# EAGLE board VDA (EAGLE 9.6.2)
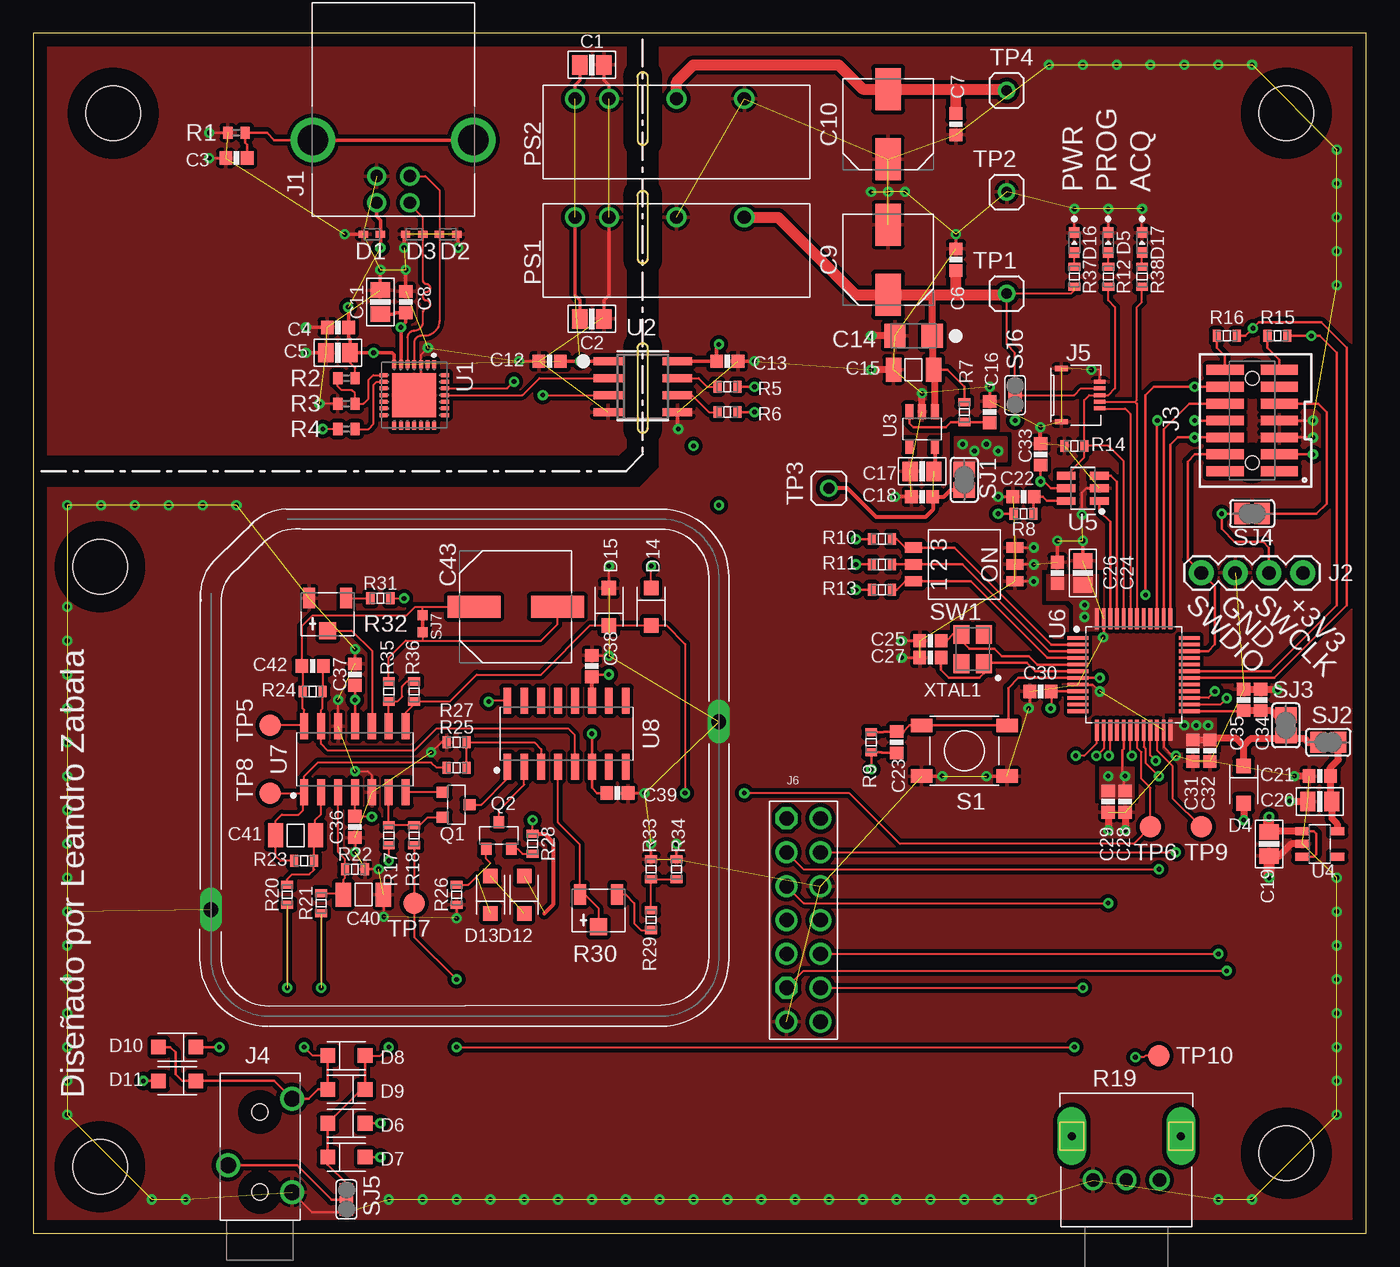
[diagram p0: board, top side]
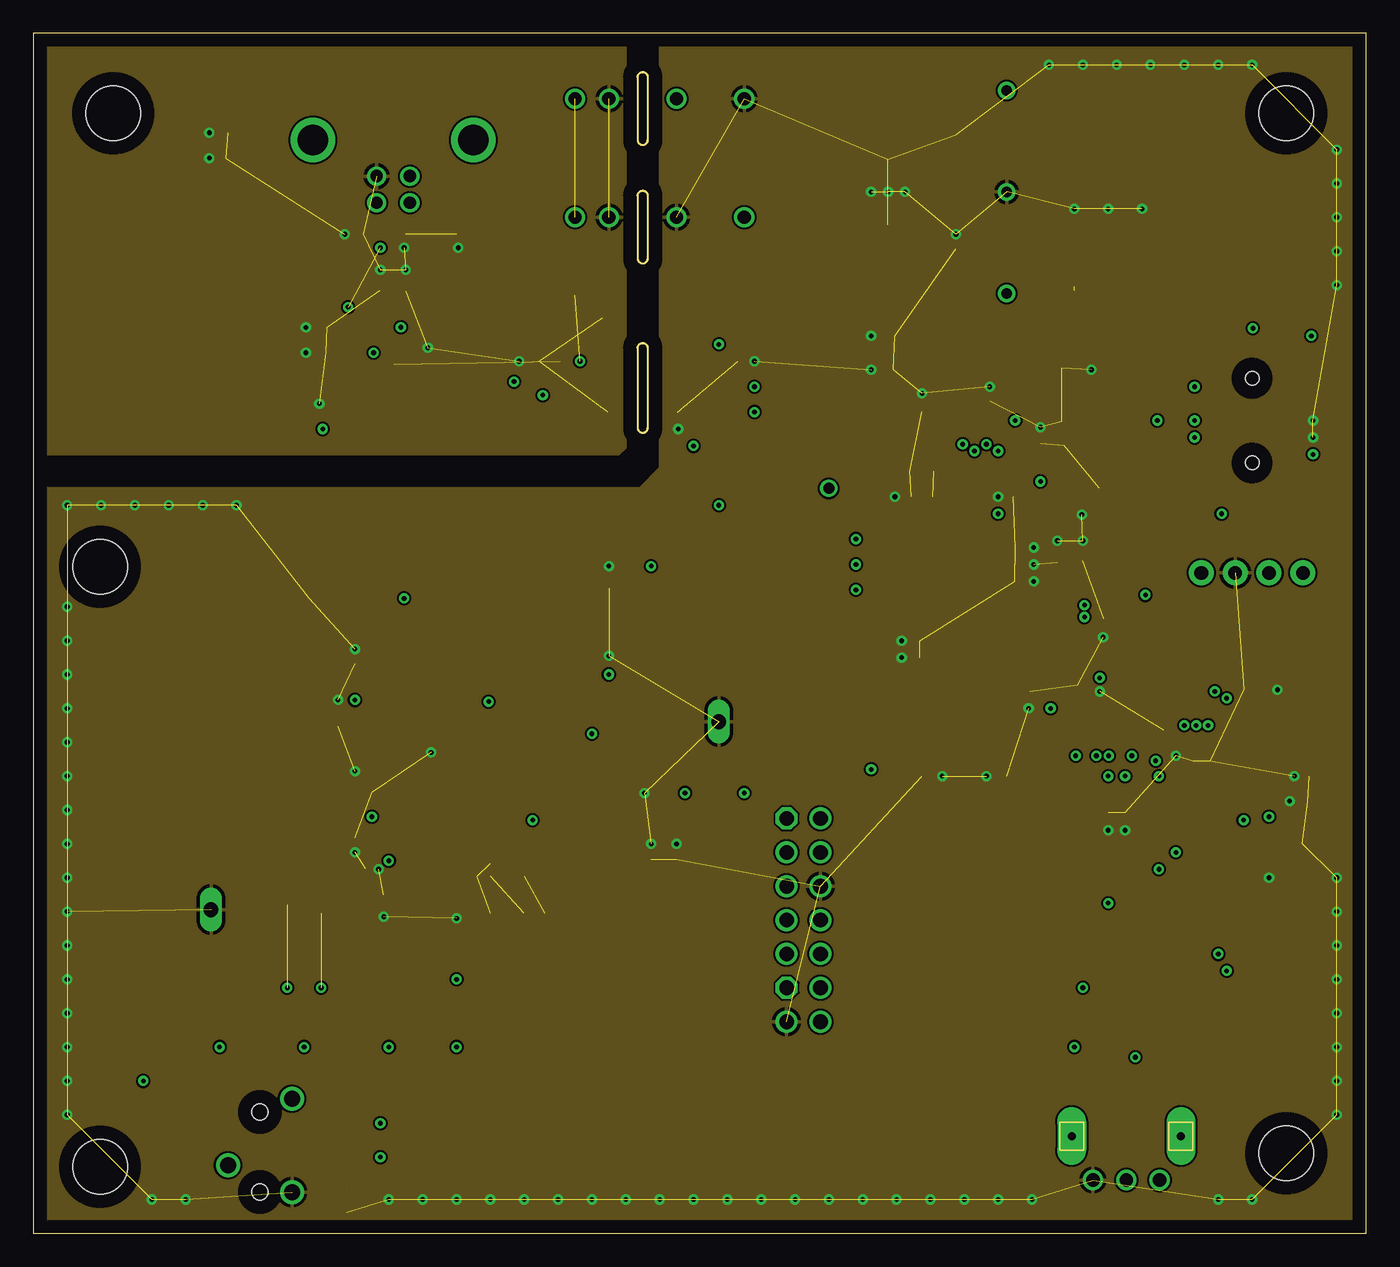
[diagram p1: board, inner layer Route2]
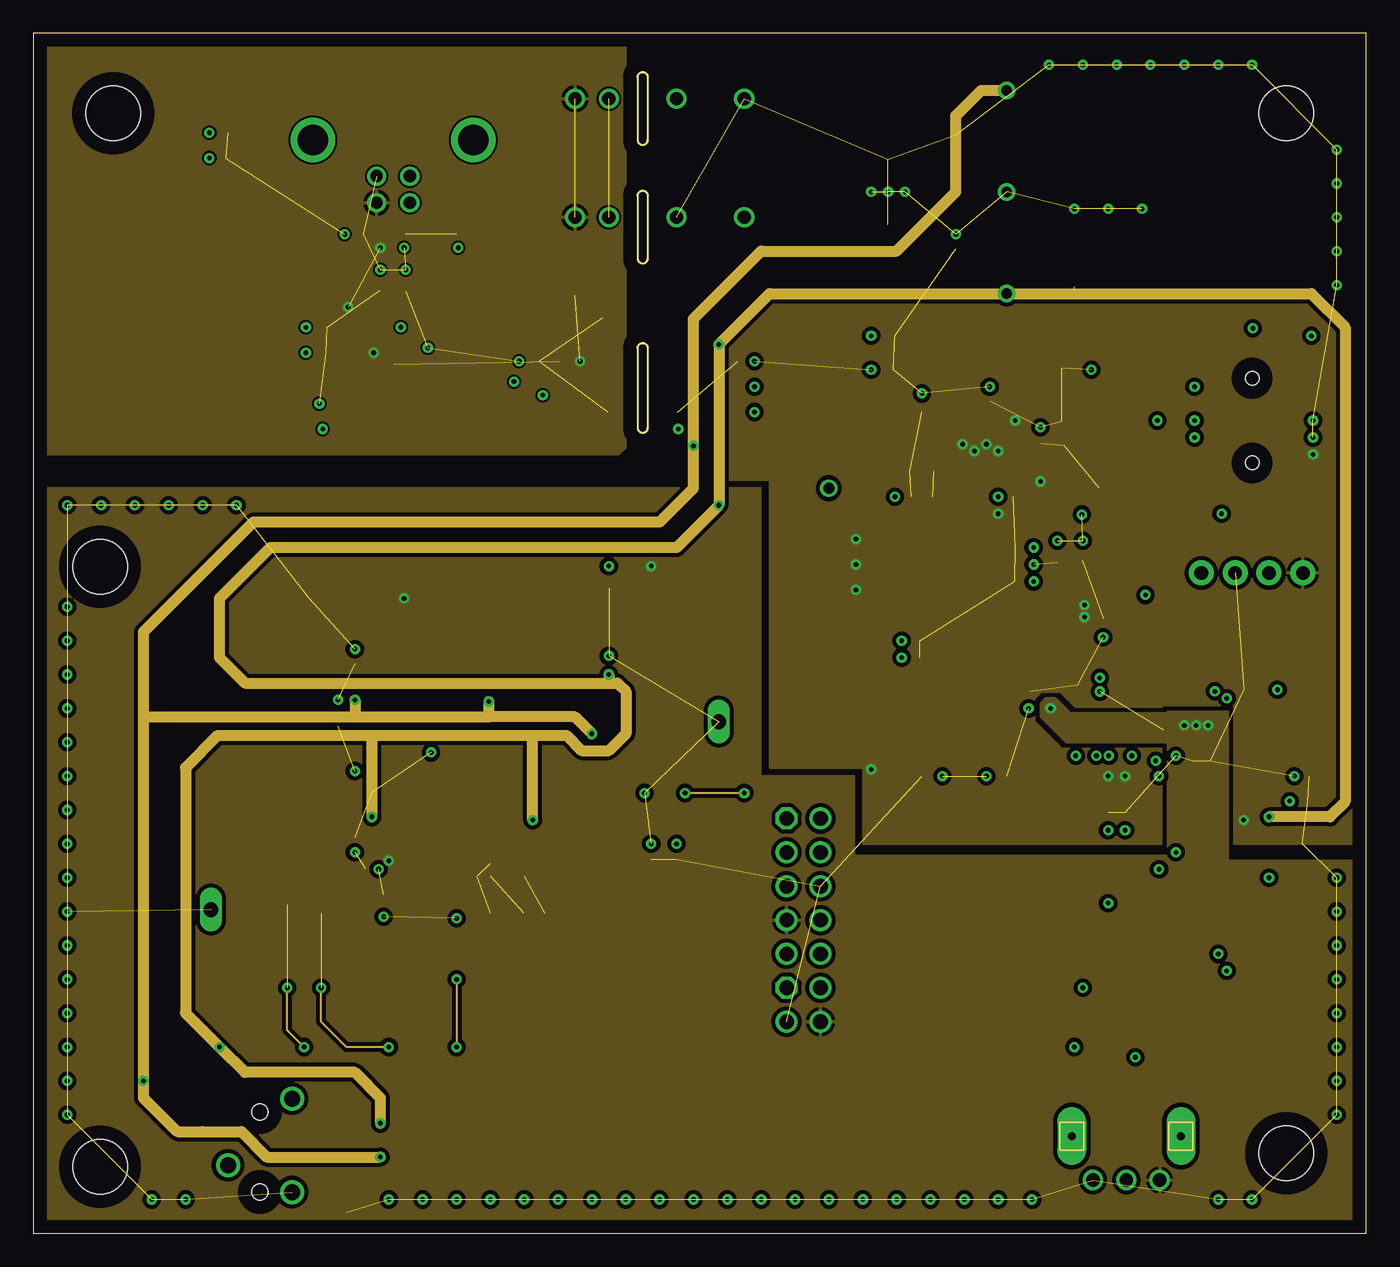
[diagram p2: board, inner layer Route15]
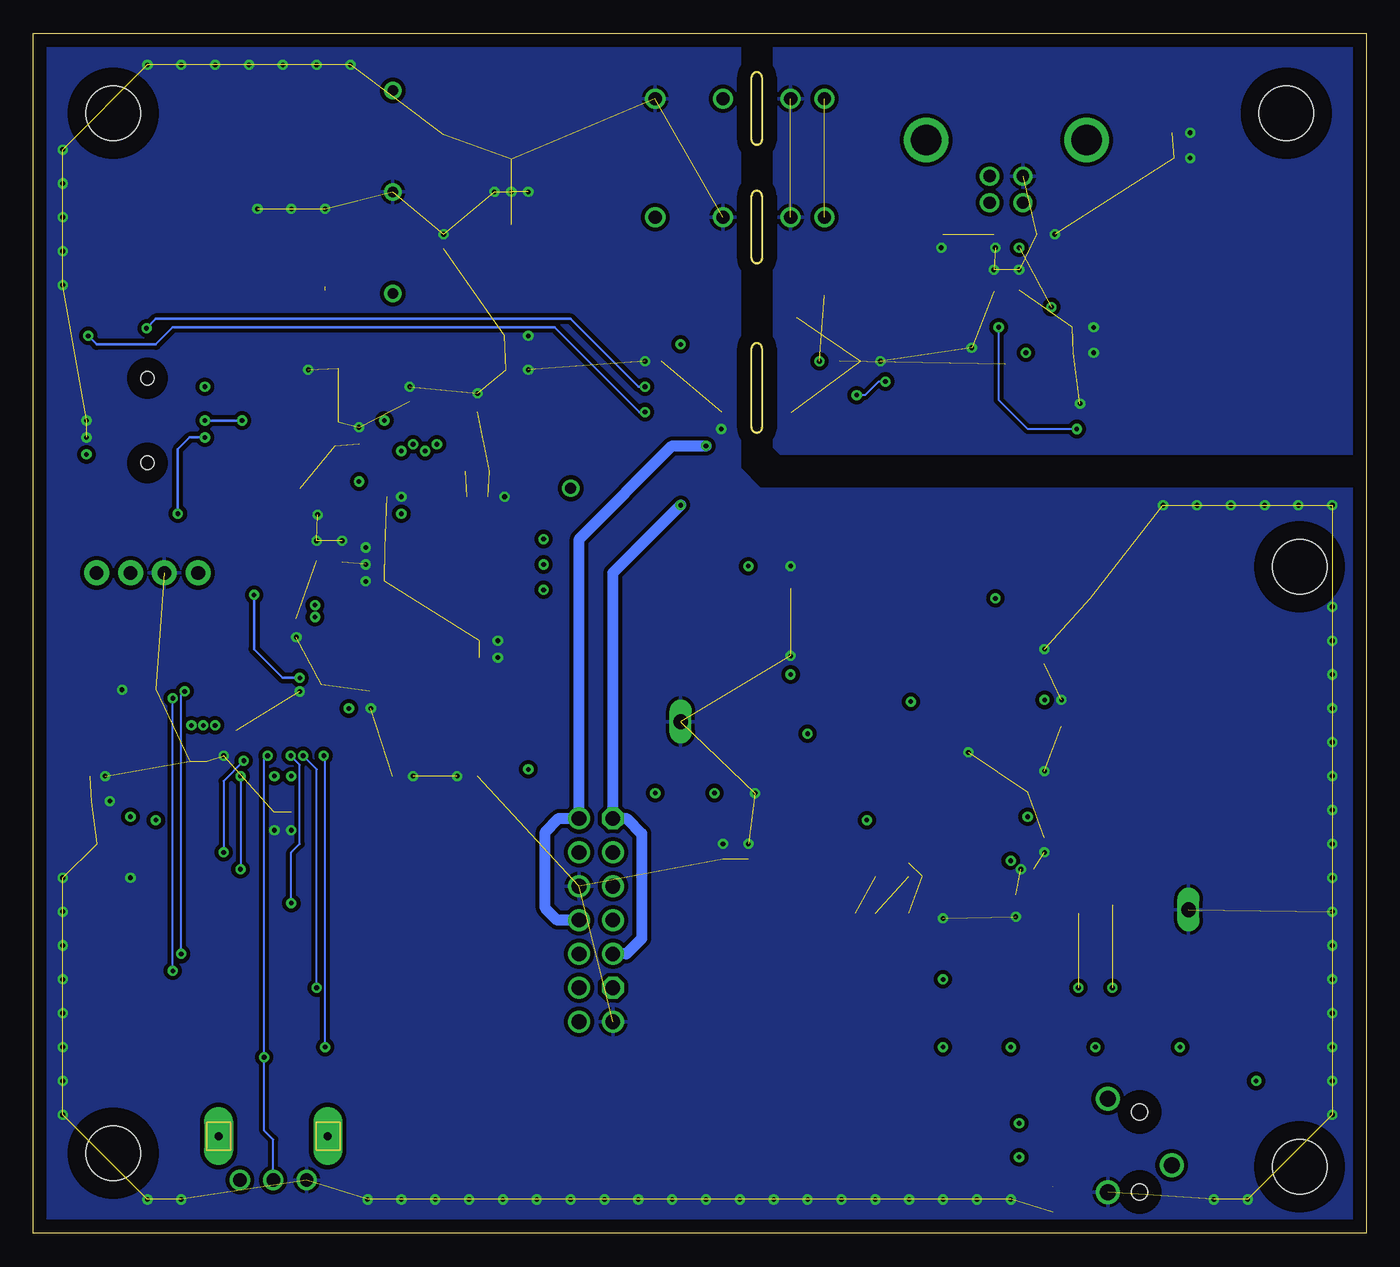
[diagram p3: board, bottom side, seen from below]

Size 100 x 90 mm. Coordinates in mm from the lower left corner, seen from the top.
Outline: 0,0 100,0 100,90 0,90 0,0
Outline: 45.34,66.39 45.34,60.42 arc90 45.72,60.04 arc90 46.1,60.42 46.1,66.39 arc90 45.72,66.77 arc90 45.34,66.39
Outline: 45.34,77.82 45.34,73.12 arc90 45.72,72.74 arc90 46.1,73.12 46.1,77.82 arc90 45.72,78.2 arc90 45.34,77.82
Outline: 45.34,86.71 45.34,82.01 arc90 45.72,81.63 arc90 46.1,82.01 46.1,86.71 arc90 45.72,87.09 arc90 45.34,86.71
Copper layers (1+2*15+16): Top 0.035mm / dielectric 0.14mm / Route2 0.035mm / dielectric 1.2mm / Route15 0.035mm / dielectric 0.2mm / Bottom 0.035mm
Design rules "default *": minimum track width 6mil, minimum drill 0.35mm, track to track 6mil, track to pad 6mil, pad to pad 6mil, via to via 6mil, smd to smd 6mil, copper to edge 40mil, drill to drill 6mil, minimum pad ring 10mil, minimum via ring 8mil, stop-mask expansion 4mil, vias tented up to drill 9999mil, thermal gap 10mil
Holes 4.1 mm at 6,84 94,84 94,6 5,5 5,50
tRestrict: area 3,81 to 9,87; area 91,81 to 97,87; area 91,3 to 97,9; area 2,2 to 8,8; area 2,47 to 8,53
bRestrict: area 3,81 to 9,87; area 91,81 to 97,87; area 91,3 to 97,9; area 2,2 to 8,8; area 2,47 to 8,53
vRestrict: area 3,81 to 9,87; area 91,81 to 97,87; area 91,3 to 97,9; area 2,2 to 8,8; area 2,47 to 8,53

## Footprints (pad centres in the part's own frame; a part is rotated, then mirrored left to right if it is on the bottom)
C_0805 = smd 1.15 x 1.45: P$1 -0.9,0; P$2 0.9,0
C_0603 = smd 0.95 x 1: P$1 -0.8,0; P$2 0.8,0
CAPAE660X590N = smd 3.165 x 1.92: + -2.625,0; - 2.625,0
A_3216 = smd 1.6 x 1.8: A -1.4,0; K 1.4,0
C_1206 = smd 1.15 x 1.8: P$1 -1.5,0; P$2 1.5,0
CAPAE830X680N = smd 3.965 x 1.62: 1 -3.125,0; 2 3.125,0
SOD523 = smd 0.7 x 0.5: A 0.65,0; C -0.65,0
SOD123W = smd 1.1 x 1.1: A 1.4,0; C -1.4,0
LED_0603_ARROW = smd 0.787 x 0.787: A 0.749,0; K -0.749,0
USB-B = drill 0.92: 1 1.25,4.71; 2 -1.25,4.71; 3 -1.25,2.71; 4 1.25,2.71 | drill 2.3: M1 -6.02,0; M2 6.02,0
1X04 = drill 1.016 pad 1.88: 1 0,0; 2 2.54,0; 3 5.08,0; 4 7.62,0
SAMTEC_FTSH-107-01-L-DV-K-A = smd 0.74 x 2.79: 01 -3.81,-2.035; 02 -3.81,2.035; 03 -2.54,-2.035; 04 -2.54,2.035; 05 -1.27,-2.035; 06 -1.27,2.035; 07 0,-2.035; 08 0,2.035; 09 1.27,-2.035; 10 1.27,2.035; 11 2.54,-2.035; 12 2.54,2.035; 13 3.81,-2.035; 14 3.81,2.035 | hole 1.02: 3.175,0; -3.175,0
PJ-3200 = drill 1.2: 1 2.1,-2.4; 2 9.1,-2.4; 3 4.1,2.4 | hole 1.2: 2.1,0; 8.1,0
F0504-H-05-10G-R = smd 0.3 x 0.85: P$1 -1,1.905; P$2 -0.5,1.905; P$3 0,1.905; P$4 0.5,1.905; P$5 1,1.905 | smd 0.4 x 0.95: P$7 -2,-0.97; P$8 2,-0.97
CONN-VERT-2.54MM-2X7-FEMALE = drill 1.1 octagon: 1 -7.62,-1.27; 11 5.08,-1.27 | drill 1.1: 2 -7.62,1.27; 3 -5.08,-1.27; 4 -5.08,1.27; 5 -2.54,-1.27; 6 -2.54,1.27; 7 0,-1.27; 8 0,1.27; 9 2.54,-1.27; 10 2.54,1.27; 12 5.08,1.27; 13 7.62,-1.27; 14 7.62,1.27
0505S-2WR3 = drill 1: +VIN -7.62,0; +VOUT 5.08,0; -VIN -5.08,0; -VOUT 0,0
SOT-23 = smd 0.8 x 0.9: 1 -0.94,-1.003; 2 0.94,-1.003; 3 0,1.003
R0402 = smd 0.7 x 0.9: 1 -0.65,0; 2 0.65,0
R_0603 = smd 0.61 x 0.889: 1 -0.749,0; 2 0.749,0
POT-09VR1M = drill 1: P$1 0,-2.5; P$2 0,0; P$3 0,2.5 | drill 0.6 pad 2.184 long: P$4 -3.3,4.1; P$5 -3.3,-4.1
RV3.2X4 = smd 1.55 x 0.89: 1 1.93,-2.525; 3 1.93,0.265 | smd 1.27 x 1.27: 2 -0.51,-1.13
SMTR2 = smd 1.6 x 1: P$1 -3.2,1.9; P$2 3.2,1.9; P$3 -3.2,-1.9; P$4 3.2,-1.9
MS384 = drill 1.1 long: P$1 -19.05,-10.65; P$2 19.05,3.45
SJ = smd 1.168 x 1.6: 1 -0.762,0; 2 0.762,0
SJ_2S = smd 0.508 x 1.016: COM 0,0; NC -0.953,0; NO 0.953,0
SJ1 = smd 0.762 x 0.762: P$1 -0.635,0; P$2 0.635,0
DIPSW-3 = smd 0.76 x 1.27: P$1 -1.27,-3.81; P$2 -1.27,3.81; P$3 0,-3.81; P$4 0,3.81; P$5 1.27,-3.81; P$6 1.27,3.81
HOLE_0.8MM = drill 0.8: 1 0,0
TP16R = smd 1.6 x 1.6: TP 0,0
MLP28 = smd 0.6 x 0.3: 1 -2.3,1.5; 2 -2.3,1; 3 -2.3,0.5; 4 -2.3,0; 5 -2.3,-0.5; 6 -2.3,-1; 7 -2.3,-1.5; 15 2.3,-1.5; 16 2.3,-1; 17 2.3,-0.5; 18 2.3,0; 19 2.3,0.5; 20 2.3,1; 21 2.3,1.5 | smd 0.3 x 0.6: 8 -1.5,-2.3; 9 -1,-2.3; 10 -0.5,-2.3; 11 0,-2.3; 12 0.5,-2.3; 13 1,-2.3; 14 1.5,-2.3; 22 1.5,2.3; 23 1,2.3; 24 0.5,2.3; 25 0,2.3; 26 -0.5,2.3; 27 -1,2.3; 28 -1.5,2.3 | smd 3.3 x 3.3: EXP 0,0
SO8 = smd 0.6 x 2.2: 1 -1.905,-2.6; 2 -0.635,-2.6; 3 0.635,-2.6; 4 1.905,-2.6; 5 1.905,2.6; 6 0.635,2.6; 7 -0.635,2.6; 8 -1.905,2.6
SOT23-5 = smd 0.6 x 1.1: 1 -0.95,-1.3; 2 0,-1.3; 3 0.95,-1.3; 4 0.95,1.3; 5 -0.95,1.3
SOT-23-6 = smd 1.412 x 0.59: 1 -1.247,0.95; 2 -1.247,0; 3 -1.247,-0.95; 4 1.247,-0.95; 5 1.247,0; 6 1.247,0.95
QFP50P900X900X160-48N = smd 1.559 x 0.28: 1 -4.178,2.75; 2 -4.178,2.25; 3 -4.178,1.75; 4 -4.178,1.25; 5 -4.178,0.75; 6 -4.178,0.25; 7 -4.178,-0.25; 8 -4.178,-0.75; 9 -4.178,-1.25; 10 -4.178,-1.75; 11 -4.178,-2.25; 12 -4.178,-2.75; 25 4.178,-2.75; 26 4.178,-2.25; 27 4.178,-1.75; 28 4.178,-1.25; 29 4.178,-0.75; 30 4.178,-0.25; 31 4.178,0.25; 32 4.178,0.75; 33 4.178,1.25; 34 4.178,1.75; 35 4.178,2.25; 36 4.178,2.75 | smd 0.28 x 1.559: 13 -2.75,-4.178; 14 -2.25,-4.178; 15 -1.75,-4.178; 16 -1.25,-4.178; 17 -0.75,-4.178; 18 -0.25,-4.178; 19 0.25,-4.178; 20 0.75,-4.178; 21 1.25,-4.178; 22 1.75,-4.178; 23 2.25,-4.178; 24 2.75,-4.178; 37 2.75,4.178; 38 2.25,4.178; 39 1.75,4.178; 40 1.25,4.178; 41 0.75,4.178; 42 0.25,4.178; 43 -0.25,4.178; 44 -0.75,4.178; 45 -1.25,4.178; 46 -1.75,4.178; 47 -2.25,4.178; 48 -2.75,4.178
SOIC127P600X175-14N = smd 1.968 x 0.602: 1 -2.473,3.81; 2 -2.473,2.54; 3 -2.473,1.27; 4 -2.473,0; 5 -2.473,-1.27; 6 -2.473,-2.54; 7 -2.473,-3.81; 8 2.473,-3.81; 9 2.473,-2.54; 10 2.473,-1.27; 11 2.473,0; 12 2.473,1.27; 13 2.473,2.54; 14 2.473,3.81
SO16 = smd 1.972 x 0.582: 1 -2.472,4.445; 2 -2.472,3.175; 3 -2.472,1.905; 4 -2.472,0.635; 5 -2.472,-0.635; 6 -2.472,-1.905; 7 -2.472,-3.175; 8 -2.472,-4.445; 9 2.472,-4.445; 10 2.472,-3.175; 11 2.472,-1.905; 12 2.472,-0.635; 13 2.472,0.635; 14 2.472,1.905; 15 2.472,3.175; 16 2.472,4.445
XTAL3.2X2.5 = smd 1.4 x 1.2: P$1 -1.1,-0.85; P$2 1.1,-0.85; P$3 1.1,0.85; P$4 -1.1,0.85

## Placement (x,y rotation side)
C1  4.7u  [C_0805]  41.91,87.63 0 top
C2  4.7u  [C_0805]  41.91,68.58 0 top
C3  100n  [C_0603]  15.24,80.64 180 top
C4  100n  [C_0603]  22.86,67.94 180 top
C5  4.7u  [C_0805]  22.86,66.04 180 top
C6  100n  [C_0603]  69.22,73.03 90 top
C7  100n  [C_0603]  69.22,83.19 90 top
C8  100n  [C_0603]  27.94,69.85 90 top
C9  22u  [CAPAE660X590N]  64.14,73.03 90 top
C10  22u  [CAPAE660X590N]  64.14,83.19 90 top
C11  4.7u  [C_0805]  26.04,69.85 90 top
C12  100n  [C_0603]  38.73,65.41 180 top
C13  100n  [C_0603]  52.07,65.41 0 top
C14  47u  [A_3216]  66.04,67.31 180 top
C15  47u  [C_1206]  66.04,64.77 180 top
C16  220n  [C_0603]  71.75,61.59 90 top
C17  4.7u  [C_0805]  66.67,57.15 180 top
C18  100n  [C_0603]  66.67,55.24 180 top
C19  4.7u  [C_0805]  92.71,29.21 270 top
C20  4.7u  [C_0805]  96.52,32.38 180 top
C21  100n  [C_0603]  96.52,34.29 180 top
C22  220n  [C_0603]  74.3,55.24 180 top
C23  100n  [C_0603]  64.77,36.83 90 top
C24  4u7  [C_0805]  78.74,49.53 90 top
C25  10p  [C_0603]  67.31,44.45 180 top
C26  100n  [C_0603]  76.83,49.53 90 top
C27  10p  [C_0603]  67.31,43.18 180 top
C28  100n  [C_0603]  81.92,32.38 270 top
C29  100n  [C_0603]  80.64,32.38 270 top
C30  100n  [C_0603]  75.56,40.64 180 top
C31  100n  [C_0603]  87,36.2 270 top
C32  100n  [C_0603]  88.27,36.2 270 top
C33  100n  [C_0603]  75.56,58.42 90 top
C34  1u  [C_0603]  92.08,40.01 90 top
C35  100n  [C_0603]  90.81,40.01 90 top
C36  100n  [C_0603]  24.13,30.48 270 top
C37  100n  [C_0603]  24.13,41.91 270 top
C38  100n  [C_0603]  41.91,42.55 90 top
C39  100n  [C_0603]  43.81,33.02 180 top
C40  100n  [C_1206]  24.77,25.4 0 top
C41  100n  [C_1206]  19.68,29.84 180 top
C42  47n  [C_0603]  20.95,42.55 0 top
C43  DNP  [CAPAE830X680N]  36.2,46.99 0 top
D1  LESD5D5.0CT1G  [SOD523]  25.4,74.93 0 top
D2  LESD5D5.0CT1G  [SOD523]  31.11,74.93 180 top
D3  LESD5D5.0CT1G  [SOD523]  28.57,74.93 0 top
D4  D-SOD123W  [SOD123W]  90.81,33.66 270 top
D5  ORANGE  [LED_0603_ARROW]  80.64,74.3 270 top
D6  1N4148  [SOD123W]  23.5,8.26 180 top
D7  1N4148  [SOD123W]  23.5,5.71 0 top
D8  1N4148  [SOD123W]  23.5,13.34 0 top
D9  1N4148  [SOD123W]  23.5,10.79 180 top
D10  1N4148  [SOD123W]  10.79,13.97 180 top
D11  1N4148  [SOD123W]  10.79,11.43 180 top
D12  1N4148  [SOD123W]  36.83,25.4 90 top
D13  1N4148  [SOD123W]  34.29,25.4 90 top
D14  1N4148  [SOD123W]  46.35,46.99 270 top
D15  1N4148  [SOD123W]  43.18,46.99 90 top
D16  GREEN  [LED_0603_ARROW]  78.11,74.3 270 top
D17  ORANGE  [LED_0603_ARROW]  83.19,74.3 270 top
J1  USB-2.0  [USB-B]  27,82 180 top
J2  CONVERT-1X4-2.54MM-MALE_HOLES  [1X04]  87.63,49.53 0 top
J3  FTSH-107-01-L-DV-K-A  [SAMTEC_FTSH-107-01-L-DV-K-A]  91.44,60.96 90 top
J4  STEREO-JACK  [PJ-3200]  17,1 90 top
J5  F0504-H-05-10G-R  [F0504-H-05-10G-R]  78.11,62.87 270 top
J6  CONVERT-2X7-2.54MM-FEMALE  [CONN-VERT-2.54MM-2X7-FEMALE]  57.78,23.5 270 top
PS1  F0505S-2WR3L  [0505S-2WR3]  48.26,76.2 0 top
PS2  F0505S-2WR3L  [0505S-2WR3]  48.26,85.09 0 top
Q1  BC856  [SOT-23]  31.73,32.15 270 top
Q2  BC856  [SOT-23]  34.92,29.84 0 top
R1  47.5k  [R0402]  15.24,82.55 180 top
R2  22.1k  [R0402]  23.5,64.14 0 top
R3  47.5k  [R0402]  23.5,62.23 180 top
R4  1k  [R0402]  23.5,60.33 0 top
R5  100  [R_0603]  52.07,63.5 0 top
R6  100  [R_0603]  52.07,61.59 0 top
R7  100k  [R_0603]  69.85,61.59 90 top
R8  10k  [R_0603]  74.3,53.98 180 top
R9  10k  [R_0603]  62.87,36.83 270 top
R10  10k  [R_0603]  63.66,52.07 180 top
R11  10k  [R_0603]  63.66,50.16 180 top
R12  270  [R_0603]  80.64,71.75 90 top
R13  10k  [R_0603]  63.66,48.26 180 top
R14  10k  [R_0603]  78.11,59.05 180 top
R15  100  [R_0603]  93.34,67.31 180 top
R16  100  [R_0603]  89.53,67.31 180 top
R17  DNP  [R_0603]  26.67,29.84 270 top
R18  33k  [R_0603]  28.57,29.84 270 top
R19  10k  [POT-09VR1M]  82,4 270 top
R20  100  [R_0603]  19.05,25.4 270 top
R21  100  [R_0603]  21.59,24.77 270 top
R22  10M  [R_0603]  24.13,27.3 180 top
R23  10M  [R_0603]  20.32,27.94 0 top
R24  100k  [R_0603]  20.95,40.64 180 top
R25  1k  [R_0603]  31.75,34.92 0 top
R26  150  [R_0603]  31.75,25.4 90 top
R27  2k  [R_0603]  31.75,36.83 180 top
R28  1k  [R_0603]  37.47,29.21 90 top
R29  100  [R_0603]  46.35,23.5 90 top
R30  500  [RV3.2X4]  41.27,23.5 90 top
R31  1k  [R_0603]  26.04,47.62 0 top
R32  500  [RV3.2X4]  20.95,45.72 90 top
R33  100  [R_0603]  46.35,27.3 90 top
R34  DNP  [R_0603]  48.26,27.3 90 top
R35  1k  [R_0603]  26.67,40.64 270 top
R36  2k2  [R_0603]  28.57,40.64 270 top
R37  270  [R_0603]  78.11,71.75 90 top
R38  270  [R_0603]  83.19,71.75 90 top
S1  TSWITCH_SMTR2  [SMTR2]  69.85,36.2 0 top
SHIELD1  MS384  [MS384]  32.38,34.92 0 top
SJ1  [SJ]  69.85,56.52 270 top
SJ2  [SJ]  97.16,36.83 0 top
SJ3  [SJ]  93.98,38.1 90 top
SJ4  [SJ]  91.44,53.98 180 top
SJ5  [SJ_2S]  23.5,2.54 270 top
SJ6  [SJ_2S]  73.66,62.87 270 top
SJ7  SJUMPER-NC  [SJ1]  29.21,45.72 270 top
SW1  DSHP03TSGER  [DIPSW-3]  69.85,50.16 270 top
TP1  HOLE_0.8MM  [HOLE_0.8MM]  73.03,70.48 0 top
TP2  HOLE_0.8MM  [HOLE_0.8MM]  73.03,78.11 0 top
TP3  HOLE_0.8MM  [HOLE_0.8MM]  59.69,55.88 90 top
TP4  HOLE_0.8MM  [HOLE_0.8MM]  73.03,85.72 0 top
TP5  TPTP16R  [TP16R]  17.78,38.1 90 top
TP6  TPTP16R  [TP16R]  83.82,30.48 0 top
TP7  TPTP16R  [TP16R]  28.57,24.77 180 top
TP8  TPTP16R  [TP16R]  17.78,33.02 90 top
TP9  TPTP16R  [TP16R]  87.63,30.48 0 top
TP10  TPTP16R  [TP16R]  84.45,13.34 0 top
U1  CP2102N-28  [MLP28]  28.57,62.87 270 top
U2  ISO7721DR  [SO8]  45.72,63.5 270 top
U3  LP5907MFX-3.3/NOPB  [SOT23-5]  66.67,60.33 180 top
U4  LP5907MFX-3.3/NOPB  [SOT23-5]  96.52,29.21 270 top
U5  SN74LVC1G175  [SOT-23-6]  78.74,55.88 180 top
U6  STM32F373CBT6  [QFP50P900X900X160-48N]  82.55,41.91 0 top
U7  TL074  [SOIC127P600X175-14N]  24.13,35.56 90 top
U8  LM13700  [SO16]  40.01,37.47 90 top
XTAL1  8MHz  [XTAL3.2X2.5]  70.48,43.81 90 top

## Library data of the parts
C1-C14 C16 C17 C19 C20 C22-C33 C36-C39 C42 C43 D5-D17 Q1 Q2 R5-R18 R24-R29 R31 R33-R38 = Property-standar
C15 = Property-standar; D: X7R; ESR: LOW; V: 10V
C18 C21 C34 C35 = Property-standar; V: 16V
C40 C41 = Property-standar; DESCRIPTION: NP0-C0G
D1-D3 S1 U1 U6 U7 = property
D4 = Property-standar; TYPE: Schotky
J1 J4 = Connectors
J2 J5 J6 TP1-TP4 = property-connectors
J3 = property-connectors; MANUFACTURER: Samtec; MAXIMUM_PACKAGE_HEIGHT: 6.23mm; PARTREV: H; STANDARD: Manufacturer Recommendation
PS1 PS2 = Power-Supply
R1-R4 = resistor
R19 = Property-standar; MPN: RK09K1110077
R20-R23 = Property-standar; DESCRIPTION: FILM
R30 R32 = Property-standar; MPN: 3224W-1-501E
SHIELD1 = shields
SJ1-SJ4 = jumper
SJ5 SJ6 TP5-TP10 = property-pads
SJ7 SW1 = properti-mechanical
U2 U5 = property_digital
U3 U4 = property-power
U8 = property_analog
XTAL1 = property; MPN: 830108313809

## Nets
+3V3: C23.P$1 C24.P$1 C26.P$1 C28.P$1 C29.P$1 C33.P$1 D4.A J2.4 J3.03 R8.2 R9.2 R10.2 R11.2 R13.2 SJ1.1 SJ6.NO U5.5 U6.17 U6.48
+3V3A: C30.P$1 C31.P$1 C32.P$1 D4.C D14.C J6.7 J6.14 R17.2 R19.P$3 R31.2 SJ2.1 SJ3.1 U6.9 U6.24
+5V: C6.P$1 C9.+ C13.P$1 C14.A C15.P$1 C19.P$1 C36.P$1 C38.P$1 D6.C D10.C D12.A J6.1 J6.9 PS1.+VOUT R7.2 R28.2 R37.1 SJ6.NC TP1.1 U2.8 U3.1 U4.1 U4.3 U7.4 U8.11
-5V: C7.P$2 C10.- C37.P$2 C39.P$2 D7.A D11.A J6.2 J6.8 PS2.-VOUT TP4.1 U7.11 U8.6 U8.16
ACQ_LED: J5.P$4 R38.1 U6.42
BOOT0: J5.P$3 R12.1 R14.1 U5.4 U6.44
DAC1_CH1: R18.2 TP7.TP U6.13
DAC1_CH2: J6.12 U6.14
DAC2_CH1: J6.5 U6.15
FF_CLK: U5.1 U6.46
FF_CLR: C22.P$1 R8.1 U5.6
FF_D: U5.3 U6.45
GND: C6.P$2 C7.P$1 C9.- C10.+ C13.P$2 C14.K C15.P$2 C16.P$2 C17.P$2 C18.P$2 C19.P$2 C20.P$2 C21.P$2 C22.P$2 C24.P$2 C25.P$2 C26.P$2 C27.P$2 C28.P$2 C29.P$2 C30.P$2 C31.P$2 C32.P$2 C33.P$2 C34.P$2 C35.P$2 C36.P$2 C37.P$1 C38.P$2 C39.P$1 C40.P$2 D5.K D15.A D16.K D17.K J2.2 J3.05 J3.07 J4.1 J5.P$1 J5.P$7 J5.P$8 J6.6 J6.13 PS1.-VOUT PS2.+VOUT R14.2 R19.P$1 R22.1 R26.1 R27.2 R32.3 R33.2 R34.2 S1.P$3 S1.P$4 SHIELD1.P$1 SHIELD1.P$2 SJ5.NO SW1.P$2 SW1.P$4 SW1.P$6 TP2.1 U2.5 U3.2 U4.2 U5.2 U6.8 U6.23 U6.47 U7.5 U7.12
GND-1: C1.P$2 C2.P$2 C3.P$2 C4.P$2 C5.P$2 C8.P$2 C11.P$2 C12.P$2 D1.C D2.C D3.C J1.4 PS1.-VIN PS2.-VIN R1.2 R3.2 U1.3 U1.EXP U2.4
I_ABC: Q1.3 U8.1
JCLK: J2.3 J3.06 SJ4.2 U6.37
JRCLK: J3.09 SJ4.1
JTDI: J3.10 U6.38
JTDO: J3.08 U6.39
JTMS: J2.1 J3.04 U6.34
MCU_RX: J3.13 R15.2
MCU_TX: J3.14 R16.2
N$1: C17.P$1 C18.P$1 SJ1.2 TP3.1 U3.5
N$2: C42.P$1 C43.1 R24.2 SJ7.P$1 TP5.TP U7.14
N$3: C40.P$1 R21.1 R22.2 U7.3
N$4: C41.P$1 R20.1 R23.2 U7.2
N$5: C43.2 R35.1 SJ7.P$2
N$6: J4.3 SJ5.COM
N$7: Q1.2 R17.1 R18.1 U7.6
N$8: D17.A R38.2
N$9: R29.2 R33.1 R34.1
N$10: Q1.1 U7.7
N$11: Q2.2 R28.1
N$12: D12.C D13.A
N$13: R31.1 R32.1
N$14: D16.A R37.2
N$15: D5.A R12.2
N$16: D8.C D9.A D10.A D11.C J4.2 R20.2
N$17: D6.A D7.C D8.A D9.C R21.2 SJ5.NC
N$18: R32.2 U7.10
N$19: R25.2 R27.1 U8.3
N$20: R30.2 R30.3 U8.4
N$21: Q2.3 U8.2
N$22: R29.1 R30.1
N$23: J5.P$2 SJ6.COM
N$24: D13.C Q2.1 R26.2
N$27: R35.2 R36.1 U7.9
N$46: C16.P$1 R7.1 U3.3
N$50: C20.P$1 C21.P$1 SJ2.2 U4.5
N$54: R4.2 U1.9
NRST: C23.P$2 J3.12 R9.1 S1.P$1 S1.P$2 U6.7
OSC2_IN: C25.P$1 U6.5 XTAL1.P$3
OSC2_OUT: C27.P$1 U6.6 XTAL1.P$1
OUT_CHARGE_AMP: C41.P$2 R23.1 R25.1 TP8.TP U7.1
OUT_OTA: C42.P$2 R24.1 U7.13 U8.5
POWER_LED: J5.P$5 U6.43
RXD: U1.25 U2.2
SDADC1_CH4: J6.3 U6.20
SDADC1_CH5: D14.A D15.C R36.2 TP6.TP U6.19 U7.8
SDADC1_CH6: R19.P$2 TP10.TP U6.18
SDADC1_CH7: TP9.TP U6.22
SDADC1_CH8: J6.4 U6.21
SDADC3_CH7: J6.10 U6.27
SDADC3_CH8: J6.11 U6.26
SHIELD: C3.P$1 J1.M1 J1.M2 R1.1
SW_1: R10.1 SW1.P$1 U6.2
SW_2: R11.1 SW1.P$3 U6.3
SW_3: R13.1 SW1.P$5 U6.4
TXD: U1.26 U2.3
USART_RX: R6.2 R15.1 U6.31
USART_TX: R5.2 R16.1 U6.30
USB_DET: R2.1 R3.1 U1.8
USB_DN: D3.A J1.2 U1.5
USB_DP: D2.A J1.3 U1.4
USB_RXD: R5.1 U2.7
USB_TXD: R6.1 U2.6
VBAT: U6.1
VDD_BRIDGE: C8.P$1 C11.P$1 R4.1 U1.6
VREF_SDADC: C34.P$1 C35.P$1 SJ3.2 U6.25
VUSB: C1.P$1 C2.P$1 C4.P$1 C5.P$1 C12.P$1 D1.A J1.1 PS1.+VIN PS2.+VIN R2.2 U1.7 U2.1

## Tracks (layer width: path | path; a pad name or v marks a point on that pad's centre or on a via)
+3V3  (via drill 0.35)
  Top 0.152: 81.8,33.3 C28.P$1
  Top 0.203: C23.P$1 63.68,36.03 63.63,36.08 R9.2 v62.87,34.8 | R13.2 v61.72,48.26 | R11.2 v61.72,50.16 | 81.8,33.3 81.8,34.29 81.7,34.39 81.7,36.23 81.8,36.33 U6.17 | J3.03 v96.01,58.42 | R8.2 v72.39,53.98 | U5.5 76.33,55.88 75.82,56.39 v75.56,56.39 C33.P$1 | R10.2 v61.72,52.07 | SJ6.NO v73.66,60.96
  Top 0.508: D4.A v90.81,30.99
  other vias: 69.72,59.18 70.61,58.67 71.5,59.18 72.39,58.67 78.87,47.12 78.87,46.23 80.64,34.29 81.92,34.29
  pour Top (no thermals): 76.07,49.4 79.88,49.4 79.88,45.21 78.11,45.21 78.11,47.12 77.72,47.5 76.07,47.5
  pour Top (no thermals): 80.01,32.64 82.55,32.64 82.55,34.92 80.01,34.92
  pour Top (no thermals): 69.09,59.69 69.09,56.77 70.61,56.77 70.61,57.91 73.03,57.91 73.03,59.69
  pour Route15 (isolate 0.305, rank 2): 46.99,92.71 46.99,56.52 55.24,56.52 55.24,34.92 62.23,34.92 62.23,29.21 102.87,29.21 102.87,92.71
+3V3A  (via drill 0.35)
  Top 0.152: R31.2 v27.81,47.62 | D14.C v46.35,50.04 | R17.2 v26.67,27.94 | C30.P$1 76.36,39.41 v76.33,39.37
  Top 0.203: U6.9 76.39,40.66 C30.P$1
  Top 0.508: C31.P$1 C32.P$1 88.39,37.12 90.26,37.12 90.81,36.58 | SJ2.1 95.63,36.83 95.38,37.08 94.23,37.08 SJ3.1 93.73,37.08 91.31,37.08 90.81,36.58 | D4.C 90.81,36.58
  other vias: 86.36,38.1 87.25,38.1 88.14,38.1
  pour Top (no thermals): 88.77,38.61 85.22,38.61 85.22,36.7 85.47,36.45 88.77,36.45
  pour Route15: 88.77,38.99 77.85,38.99 76.71,40.13 75.95,40.13 75.56,39.75 75.56,38.73 77.47,36.83 88.65,36.83 89.28,37.47 89.28,38.48
  pour Route15 (isolate 0.305): -2.54,55.88 -2.54,-2.54 102.87,-2.54 102.87,27.94 89.66,27.94 89.66,39.12 85.09,39.12 85.09,28.32 61.59,28.32 61.59,34.29 54.61,34.29 54.61,55.88
+5V  (via drill 0.35)  (2 unrouted)
  Top 0.152: U7.4 C36.P$1 25.36,31.28 v25.4,31.24 | R28.2 v37.47,30.99 | SJ6.NC 73.66,66.04 73.03,66.67 TP1.1 77.84,70.48 78.11,70.75
  Top 0.203: C15.P$1 68.58,64.77 69.85,63.5 R7.2 | U4.1 96.08,30.16 96.27,29.97 96.27,28.45 96.08,28.26 U4.3 | v13.97,13.97 D10.C | D6.C v26.04,8.26 | C38.P$1 42.08,41.91 v43.18,41.91
  Top 0.254: U2.8 C13.P$1 51.27,66.51 v51.44,66.67
  Top 0.305: U8.11 C38.P$1 | R28.2 38.37,29.96 38.99,29.34 38.99,24.64 38.35,24
  Top 0.508: U3.1 67.62,64.69 C15.P$1 67.44,64.87 C14.A 67.44,70.27 67.31,70.4 | U4.1 92.76,30.16 C19.P$1
  Top 0.813: PS1.+VOUT 55.88,76.2 61.68,70.4 C9.+ 67.31,70.4 69.22,70.4 | 69.22,70.4 72.94,70.4 TP1.1 | 69.22,70.4 C6.P$1 | C19.P$1 v92.71,31.24
  Route15 0.813: v26.04,8.26 26.04,10.16 24.13,12.06 15.88,12.06 v13.97,13.97 11.43,16.51 11.43,34.92 13.84,37.34 25.4,37.34 | v92.71,31.24 97.28,31.24 98.42,32.38 98.42,67.94 95.89,70.48 TP1.1 55.24,70.48 v51.44,66.67 v51.44,54.61 48.26,51.44 17.78,51.44 13.97,47.62 13.97,43.18 15.88,41.27 43.18,41.27 | v37.47,30.99 37.47,37.34 | 25.4,37.34 37.47,37.34 | v25.4,31.24 25.4,37.34 | 37.47,37.34 40.01,37.34 41.15,36.2 43.18,36.2 44.45,37.47 44.45,40.64 43.81,41.27 43.18,41.27 | v43.18,41.91 43.18,41.27
  Bottom 0.813: v51.44,54.61 56.52,49.53 J6.1 55.5,31.11 54.36,29.97 54.36,22.1 55.5,20.95 J6.9
-5V  (via drill 0.35)
  Top 0.152: U8.16 34.22,39.94 v34.16,39.88
  Top 0.203: D11.A v8.26,11.43 | D7.A v26.04,5.71 | U7.11 v24.13,40.01 C37.P$2 | C39.P$2 42.29,33.02 41.91,33.4 U8.6 v41.91,37.47
  Top 0.813: PS2.-VOUT 48.26,86.36 49.53,87.63 60.41,87.63 62.23,85.81 C10.- 69.22,85.81 | 69.22,85.81 72.94,85.81 TP4.1 | C7.P$2 69.22,85.81
  Route15 0.813: 8.26,38.73 8.26,45.09 16.51,53.34 46.99,53.34 49.53,55.88 v49.53,59.05 49.53,68.58 54.61,73.66 64.77,73.66 69.22,78.11 69.22,83.82 71.12,85.72 TP4.1 | 8.26,38.73 v8.26,11.43 8.26,10.16 10.79,7.62 12.7,7.62 15.62,7.62 17.52,5.71 v26.04,5.71 | v24.13,40.01 24.13,38.73 | 24.13,38.73 34.16,38.73 | v41.91,37.47 40.64,38.73 34.16,38.73 | 8.26,38.73 24.13,38.73 | v34.16,39.88 34.16,38.73
  Bottom 0.813: J6.8 60.71,23.5 61.59,24.38 61.59,30.1 60.58,31.11 J6.2 59.05,52.07 52.07,59.05 v49.53,59.05
ACQ_LED
  Top 0.152: J5.P$4 82.67,62.37 | U6.42 82.8,62.23 82.67,62.37 | 82.67,62.37 82.8,62.5 82.8,69.47 83.19,69.85 R38.1
BOOT0
  Top 0.152: U6.44 81.8,57.9 80.64,59.05 R14.1 | R14.1 78.85,62.49 79.23,62.87 J5.P$3 80.64,62.87 81.15,63.37 81.15,69.47 80.64,69.98 R12.1 | U5.4 78.85,58.19 R14.1
DAC1_CH1  (via drill 0.35)
  Top 0.152: R18.2 TP7.TP 28.57,22.23 v31.75,19.05 | v78.21,35.81 78.85,35.81 79.8,36.77 U6.13 | v31.75,13.97 v78.11,13.97
  Route15 0.152: v31.75,19.05 v31.75,13.97
  Bottom 0.152: v78.11,13.97 78.11,35.71 v78.21,35.81
DAC1_CH2  (via drill 0.35)
  Top 0.152: v79.76,35.81 80.3,36.36 U6.14 | J6.12 v78.74,18.41
  Bottom 0.152: v79.76,35.81 78.74,34.8 v78.74,18.41
DAC2_CH1  (via drill 0.35)
  Top 0.152: v80.69,35.81 80.8,35.93 U6.15 | J6.5 57.78,24.77 v80.64,24.77
  Bottom 0.152: v80.64,24.77 80.64,28.57 80.01,29.21 80.01,35.14 v80.69,35.81
FF_CLK
  Top 0.203: U5.1 79.99,54.17 80.8,53.35 U6.46
FF_CLR
  Top 0.203: U5.6 76.05,54.93 75.73,55.24 C22.P$1 75.04,55.19 R8.1
FF_D
  Top 0.203: U5.3 80.84,56.83 81.3,56.37 U6.45
GND  (via drill 0.35)  (137 unrouted)
  Top 0.152: U7.5 25.4,34.36 25.09,34.67 v24.13,34.67 | R27.2 30.62,36.83 29.86,36.07 v29.84,36.07 | R26.1 v31.75,23.62 | C37.P$1 v24.13,43.81 | U7.12 v22.86,40.01 | D15.A v43.18,50.04 | 24.93,27.36 R22.1 v25.91,27.3 | J5.P$1 80.01,64.77 v79.38,64.77 | D16.K v78.11,76.83 | D17.K v83.19,76.83 | U6.23 84.8,36.48 85.47,35.81 v85.72,35.81 | U6.8 79.49,41.16 v80.01,40.64 | R33.2 v46.35,29.21 | R34.2 v48.26,29.21 | C40.P$2 26.27,23.77 v26.29,23.75 | C36.P$2 v24.13,28.57
  Top 0.203: C27.P$2 v65.15,43.18 | C25.P$2 v65.15,44.45 | SW1.P$6 v75.06,48.9 | SW1.P$4 v75.06,50.16 | SW1.P$2 v75.06,51.44 | C30.P$2 74.77,39.46 v74.68,39.37 | J3.07 v96.01,60.96 | J3.05 v96.01,59.69 | D5.K v80.64,76.83 | U5.2 78.99,55.88 78.67,55.56 v78.67,53.91 | SJ5.NO 20.91,1.59 J4.1 | C16.P$2 v71.75,63.5 | C22.P$2 v72.39,55.24 | C6.P$2 v69.22,74.93 | v43.18,43.31 41.95,43.31 C38.P$2 | C39.P$1 v45.85,33.02 | U6.47 80.3,44.74 v80.26,44.7
  Top 0.254: U2.5 48.32,60.39 v48.39,60.33 | C13.P$2 v54.1,65.41 | S1.P$3 v68.19,34.3 v68.2,34.29 | S1.P$4 v71.5,34.29 | C24.P$2 v78.74,51.94 | C26.P$2 v76.83,51.94
  Top 0.305: C18.P$2 v64.64,55.24 | C33.P$2 v75.56,60.45
  Top 0.508: C14.K v62.87,67.31 | C15.P$2 v62.87,64.77 | U3.2 v66.67,62.99 | U4.2 94.4,29.21 93.5,28.31 C19.P$2 | C21.P$2 v94.61,34.29 | C29.P$2 v80.64,30.23 | C28.P$2 v81.92,30.23 | v93.34,40.77 93.31,40.8 C34.P$2 C35.P$2 | C20.P$2 94.29,32.38 v94.26,32.41
  Top 0.813: C19.P$2 v92.71,26.67
  other vias: 62.87,78.11 64.14,78.11 65.41,78.11 2.54,8.89 2.54,11.43 2.54,13.97 2.54,16.51 2.54,19.05 2.54,21.59 2.54,24.13 2.54,26.67 2.54,29.21 2.54,31.75 2.54,34.29 2.54,36.83 2.54,39.37 2.54,41.91 2.54,44.45 2.54,46.99 2.54,54.61 5.08,54.61 7.62,54.61 10.16,54.61 12.7,54.61 15.24,54.61 8.89,2.54 11.43,2.54 26.67,2.54 29.21,2.54 31.75,2.54 34.29,2.54 36.83,2.54 39.37,2.54 41.91,2.54 44.45,2.54 46.99,2.54 49.53,2.54 52.07,2.54 54.61,2.54 57.15,2.54 59.69,2.54 62.23,2.54 64.77,2.54 67.31,2.54 69.85,2.54 72.39,2.54 74.93,2.54 88.9,2.54 91.44,2.54 97.79,8.89 97.79,11.43 97.79,13.97 97.79,16.51 97.79,19.05 97.79,21.59 97.79,24.13 97.79,26.67 97.79,73.66 97.79,76.2 97.79,78.74 97.79,81.28 97.79,71.12 91.44,87.63 88.9,87.63 86.36,87.63 83.82,87.63 81.28,87.63 78.74,87.63 76.2,87.63
  pour Route2: 46.99,91.44 46.99,57.4 45.47,55.88 -1.27,55.88 -1.27,-1.27 101.6,-1.27 101.6,91.44
  pour Top: 62.23,82.55 62.23,73.66 66.04,73.66 66.04,82.55
  pour Top (isolate 0.305, rank 2): 46.99,92.08 46.99,57.4 45.47,55.88 -1.91,55.88 -1.91,-1.91 102.23,-1.91 102.23,92.08
  pour Top (no thermals): 49.78,40.51 53.21,40.51 53.21,36.2 49.78,36.2
  pour Top (no thermals): 11.43,26.54 14.86,26.54 14.86,22.23 11.43,22.23
  pour Bottom (isolate 0.305, rank 2): 46.99,93.34 46.99,57.4 45.47,55.88 -3.17,55.88 -3.17,-3.17 103.5,-3.17 103.5,93.34
GND-1  (via drill 0.35)  (15 unrouted)
  Top 0.152: R3.2 v21.46,62.23 | v29.6,66.41 29.07,65.89 U1.3 29.07,63.37 U1.EXP | C12.P$2 v36.45,65.41
  Top 0.203: R1.2 v13.21,82.55 | C3.P$2 v13.21,80.64
  Top 0.254: C11.P$2 v26.04,72.26 | C8.P$2 v27.94,72.26 | C4.P$2 v20.45,67.94 | C5.P$2 v20.45,66.04 | D1.C v23.37,74.93 | D3.C 27.81,74.82 v27.81,73.91 | D2.C 31.88,74.82 v31.88,73.91 | 42.71,68.68 C2.P$2 42.81,69.98 43.18,70.35 PS1.-VIN | PS2.-VIN 43.18,86.11 42.81,86.48 C1.P$2
  pour Route2: -0.64,91.44 -0.64,58.42 43.94,58.42 44.45,58.93 44.45,91.44
  pour Top (isolate 0.305): -1.27,92.08 -1.27,58.42 43.94,58.42 44.45,58.93 44.45,92.08
  pour Bottom (isolate 0.305): -2.54,93.34 -2.54,58.42 43.94,58.42 44.45,58.93 44.45,93.34
I_ABC
  Top 0.152: U8.1 35.56,34.09 33.62,32.15 Q1.3
JCLK  (via drill 0.35)
  Top 0.203: SJ4.2 v89.15,53.98 89.15,52.83 90.11,51.88 92.27,51.88 92.71,51.44 J2.3 | J3.06 v87.12,59.69 85.85,59.69 85.3,59.14 U6.37
  Bottom 0.203: v89.15,53.98 89.15,58.8 88.27,59.69 v87.12,59.69
JRCLK
  Top 0.203: SJ4.1 96.27,53.98 97.03,54.74 97.03,61.59 96.39,62.23 J3.09
JTDI
  Top 0.203: U6.38 84.8,60.29 86.74,62.23 J3.10
JTDO  (via drill 0.35)
  Top 0.203: U6.39 84.3,60.93 v84.33,60.96 | v87.12,60.96 J3.08
  Bottom 0.203: v84.33,60.96 v87.12,60.96
JTMS
  Top 0.203: J3.04 87.15,58.42 86.61,57.88 86.61,50.55 J2.1 88.65,48.51 88.65,44.17 88.14,43.66 U6.34
MCU_RX
  Top 0.203: R15.2 92.6,66.41 93.47,65.53 J3.13
MCU_TX
  Top 0.203: R16.2 88.79,66.42 89.41,65.8 J3.14
N$1  (1 unrouted)
  Top 0.152: 67.58,58.98 U3.5
  Top 0.305: SJ1.2 68.83,55.75 68.33,55.24 C18.P$1 67.47,54.27 66.93,53.72 63.25,53.72 61.09,55.88 TP3.1 | U3.5 67.62,57.2 C17.P$1
N$2
  Top 0.152: TP5.TP 20.25,38.1 U7.14 20.32,39.26 20.21,39.37 R24.2 20.21,42.49 C42.P$1 20.16,45.55 20.95,46.35 27.99,46.35 28.62,46.99 29.21,46.99 | 29.21,46.99 C43.1 | SJ7.P$1 29.21,46.99
N$3
  Top 0.152: R21.1 22.77,25.51 22.88,25.4 C40.P$1 23.27,26.55 23.38,26.67 R22.2 23.38,28.07 22.86,28.59 U7.3
N$4
  Top 0.152: U7.2 21.59,31.44 21.12,30.97 21.12,29.91 C41.P$1 21.07,29.73 R23.2 21.02,27.89 21.02,27.24 | R20.1 19.05,26.54 19.43,26.92 20.7,26.92 21.02,27.24 | 21.02,27.24 21.07,27.29
N$5
  Top 0.152: R35.1 26.67,43.18 27.94,44.45 29.21,44.45 | 29.21,44.45 38.1,44.45 39.32,45.67 C43.2 | SJ7.P$2 29.21,44.45
N$6
  Top 0.203: SJ5.COM 23.47,2.52 22.38,2.52 19.95,4.95 19.79,5.1 J4.3
N$7
  Top 0.152: R17.1 26.67,30.61 | 26.67,30.61 U7.6 | 26.67,30.61 26.68,30.59 R18.1 28.97,30.59 29.58,31.2 Q1.2
N$8
  Top 0.152: R38.2 D17.A
N$9
  Top 0.152: R29.2 R33.1 R34.1
N$10
  Top 0.152: Q1.1 U7.7
N$11
  Top 0.152: Q2.2 36.32,28.84 36.7,28.46 R28.1
N$12  (1 unrouted)
N$13
  Top 0.152: 25.34,47.57 25.26,47.65 R32.1
  Top 0.203: 25.34,47.57 R31.1
N$14
  Top 0.152: R37.2 D16.A
N$15
  Top 0.152: R12.2 D5.A
N$16  (via drill 0.35)  (2 unrouted)
  Top 0.152: D8.C 20.95,13.34 v20.32,13.97 | R20.2 v19.05,18.41
  Top 0.203: D8.C D9.A 21.36,10.79 20.67,10.1 J4.2 18.07,11.43 D11.C 11.18,11.43 10.67,11.94 10.67,13.59 10.29,13.97 D10.A
  Route15 0.152: v20.32,13.97 19.05,15.24 v19.05,18.41
N$17  (via drill 0.35)  (4 unrouted)
  Top 0.152: D8.A 26.04,13.34 v26.67,13.97 | R21.2 v21.59,18.41
  Top 0.203: D8.A D9.C 24.64,10.79 D6.A D7.C 22.09,5.15 23.5,3.75 23.5,3.5
  Route15 0.152: v26.67,13.97 23.5,13.97 21.59,15.88 v21.59,18.41
N$18
  Top 0.152: U7.10 25.4,38.73 25.4,43.68 23.87,45.21 R32.2
N$19
  Top 0.152: R25.2 R27.1 37.59,36.83 38.1,36.32 U8.3
N$20
  Top 0.152: U8.4 39.37,30.8 41.01,29.16 R30.3 41.36,25.43 42.41,24.38 R30.2
N$21
  Top 0.152: Q2.3 34.92,31.75 36.83,33.66 U8.2
N$22
  Top 0.152: R30.1 44.42,25.43 45.09,24.77 45.09,23.24 45.58,22.75 R29.1
N$23
  Top 0.152: SJ6.COM 78.11,62.87 78.61,63.37 J5.P$2
N$24  (2 unrouted)
  Top 0.152: 34.29,27.77 33.98,28.08 Q2.1 | 33.29,26.8 32.64,26.15 R26.2
N$27
  Top 0.152: U7.9 R35.2 27.32,39.89 27.69,40.26 27.69,41.02 28.05,41.39 R36.1
N$46
  Top 0.203: C16.P$1 71.7,60.85 R7.1 68.85,60.85 68.45,60.45 66.04,60.45 65.72,60.77 U3.3
N$50
  Top 0.508: SJ2.2 97.92,35.52 97.32,34.92 C21.P$1 97.32,32.48 C20.P$1 97.42,31.11 97.82,30.71 U4.5
N$54
  Top 0.152: R4.2 25.15,60.33 25.53,60.71 25.53,63.63 25.77,63.87 U1.9
NRST  (via drill 0.35)
  Top 0.203: R9.1 63.75,37.58 63.8,37.63 C23.P$2 | 65.28,37.63 65.74,38.09 S1.P$1 S1.P$2 73.15,38.2 73.15,40.89 73.92,41.66 U6.7 v80.01,41.66 | J3.12 v87.12,63.5 84.07,63.5 83.44,62.87 v83.44,47.88
  Top 0.254: C23.P$2 65.28,37.63
  Bottom 0.203: v83.44,47.88 83.44,43.81 81.28,41.66 v80.01,41.66
OSC2_IN
  Top 0.203: U6.5 75.32,42.66 74.69,43.3 72.66,43.3 72.12,43.83 70.25,43.83 69.64,44.45 XTAL1.P$3 69,44.91 68.53,44.45 C25.P$1
OSC2_OUT
  Top 0.203: U6.6 75.2,42.16 74.56,42.8 71.42,42.8 XTAL1.P$1 71.33,42 70.99,41.66 68.71,41.66 68.11,42.25 C27.P$1
OUT_CHARGE_AMP
  Top 0.152: 19.52,27.99 R23.1 18.54,27.94 18.18,28.3 C41.P$2 18.18,30.95 18.64,31.4 19.91,31.4 20.19,31.69 20.19,32.96 20.25,33.02 | R25.1 30.24,34.92 29.86,35.31 21.34,35.31 20.32,34.29 U7.1 20.29,33.05 20.25,33.02 | TP8.TP 20.25,33.02
OUT_OTA
  Top 0.152: C42.P$2 21.7,42.49 R24.1 21.7,39.37 21.59,39.26 U7.13 21.59,36.7 22.1,36.2 28.57,36.2 30.23,37.85 40.15,37.85 40.64,37.35 U8.5
POWER_LED
  Top 0.152: J5.P$5 80.03,61.85 81.92,61.85 82.3,61.47 82.3,47.75 U6.43
RXD
  Top 0.152: U1.25 36.7,62.87 37.97,64.14 U2.2
SDADC1_CH4  (via drill 0.35)
  Top 0.152: v84.45,34.29 83.44,35.31 83.44,36.34 83.3,36.48 U6.20 | J6.3 57.78,27.3 v84.45,27.3
  Bottom 0.152: v84.45,34.29 v84.45,27.3
SDADC1_CH5  (via drill 0.35)
  Top 0.152: U7.8 27.94,39.05 28.57,39.68 R36.2 31.25,39.89 33.27,41.91 38.1,41.91 41.78,45.59 D15.C D14.A 47.5,45.59 48.9,44.2 v48.9,33.02 | U6.19 82.8,36.42 83.13,36.09 83.13,34.09 83.82,33.4 TP6.TP 82.55,29.21 65.02,29.21 61.21,33.02 v53.34,33.02
  Route15 0.152: v53.34,33.02 v48.9,33.02
SDADC1_CH6  (via drill 0.35)
  Top 0.152: v82.42,35.81 82.3,35.94 U6.18 | TP10.TP 83.44,13.34 83.31,13.21 v82.68,13.21
  Bottom 0.152: R19.P$2 82,7.03 82.68,7.7 v82.68,13.21 82.68,35.56 v82.42,35.81
SDADC1_CH7
  Top 0.152: U6.22 84.3,36.22 85.47,35.05 85.47,32.64 TP9.TP
SDADC1_CH8  (via drill 0.35)
  Top 0.152: v84.21,35.44 83.8,35.85 U6.21 | J6.4 v85.72,28.57
  Bottom 0.152: v85.72,28.57 85.72,33.91 84.21,35.42 v84.21,35.44
SDADC3_CH7  (via drill 0.35)
  Top 0.152: v88.65,40.65 88.16,40.16 U6.27 | J6.10 v88.9,20.95
  Bottom 0.152: v88.9,20.95 88.9,40.39 v88.65,40.65
SDADC3_CH8  (via drill 0.35)
  Top 0.152: v89.53,40.13 89.06,39.66 U6.26 | J6.11 57.78,19.68 v89.53,19.68
  Bottom 0.152: v89.53,19.68 v89.53,40.13
SHIELD
  Top 0.203: C3.P$1 16.04,81.64 15.89,81.79 R1.1 17.53,82.55 18.08,82 J1.M2
  Top 0.254: J1.M2 J1.M1
SW_1
  Top 0.203: R10.1 64.79,52.07 65.42,51.44 SW1.P$1 69.09,51.44 76.36,44.16 U6.2
SW_2
  Top 0.203: R11.1 SW1.P$3 69.72,50.16 76.23,43.66 U6.3
SW_3
  Top 0.203: R13.1 64.79,48.26 65.42,48.9 SW1.P$5 70.36,48.9 76.09,43.16 U6.4
TXD  (via drill 0.35)
  Top 0.152: U1.26 35.55,63.37 v36.07,63.88 | v38.23,62.87 U2.3
  Bottom 0.152: v36.07,63.88 36.58,63.88 37.59,62.87 v38.23,62.87
USART_RX  (via drill 0.35)
  Top 0.203: R6.2 v54.1,61.59 | U6.31 92.83,42.16 97.79,47.12 97.79,66.04 96.52,67.31 v95.89,67.31 R15.1
  Bottom 0.203: v54.1,61.59 54.54,61.59 60.89,67.94 89.53,67.94 90.81,66.67 95.25,66.67 v95.89,67.31
USART_TX  (via drill 0.35)
  Top 0.203: R5.2 v54.1,63.5 | U6.30 93.09,41.66 98.55,47.12 98.55,66.42 96.65,68.33 91.95,68.33 v91.5,67.88 90.93,67.31 R16.1
  Bottom 0.203: v91.5,67.88 90.81,68.58 59.69,68.58 54.61,63.5 v54.1,63.5
USB_DET
  Top 0.152: R2.1 22.84,63.52 23.11,63.25 23.88,63.25 24.13,62.99 24.13,62.24 R3.1 24.77,62.23 25.15,62.61 25.15,64.01 25.5,64.36 U1.8
USB_DN
  Top 0.152: J1.2 28.25,77.16 29.23,76.19 D3.A 29.23,71.47 arc90 29.49,71.2 arc-90 29.76,70.94 29.76,70.85 arc-90 29.49,70.59 arc90 29.23,70.32 29.23,70.24 arc90 29.49,69.97 arc-90 29.76,69.7 29.76,69.62 arc-90 29.49,69.36 arc90 29.23,69.09 29.23,68.34 arc-90 28.57,67.69 arc90 28.07,67.19 U1.5
USB_DP
  Top 0.152: J1.3 29.42,79.29 30.48,78.23 30.48,74.94 D2.A 30.46,68.44 arc-90 29.34,67.31 29.08,67.31 arc90 28.57,66.8 U1.4
USB_RXD
  Top 0.152: U2.7 49.92,64.14 50.56,63.5 R5.1
USB_TXD
  Top 0.152: U2.6 49.42,62.87 50.69,61.59 R6.1
VDD_BRIDGE  (via drill 0.35)
  Top 0.152: R4.1 v21.72,60.33
  Top 0.254: U1.6 v27.57,67.96 27.94,68.33 C8.P$1 27.18,69.05 27.08,68.95 C11.P$1
  Bottom 0.152: v21.72,60.33 25.4,60.33 27.57,62.5 v27.57,67.96
VREF_SDADC
  Top 0.203: C35.P$1 90.76,39.16 U6.25
  Top 0.508: C35.P$1 C34.P$1 92.88,39.2 93.22,38.86 SJ3.2
VUSB  (via drill 0.35)  (4 unrouted)
  Top 0.152: R2.2 24.14,64.89 23.76,65.28 C5.P$1
  Top 0.254: U1.7 27.07,65.89 26.92,66.04 v25.53,66.04 C5.P$1 23.76,67.08 23.66,67.18 C4.P$1 23.66,69.43 v23.62,69.47 | U2.1 v41.02,65.41 C12.P$1 | J1.1 25.75,76.27 26.05,75.97 D1.A 26.05,73.93 v26.04,73.91 | PS2.+VIN 40.64,86.11 41.01,86.48 C1.P$1 | PS1.+VIN 40.64,70.35 41.01,69.98 C2.P$1
  pour Route15: -1.91,92.71 -1.91,58.42 43.94,58.42 44.45,58.93 44.45,92.71

## Text on the board
tPlace: PWR | PROG | ACQ | SWDIO | GND | SWCLK | +3V3 | Diseñado por Leandro Zabala